# Altium PCB ad_test2_PCB_4_Temp.PcbDoc
Units mil, origin at the board's own origin, x right, y up, seen from the top; angles counter-clockwise.
Board outline 2150 x 870 mil, 4 copper layers (Top Layer, VCC, GND, Bottom Layer), stack 35.6 mil thick; 23 components, 22 nets, 98 pads, 12 vias.
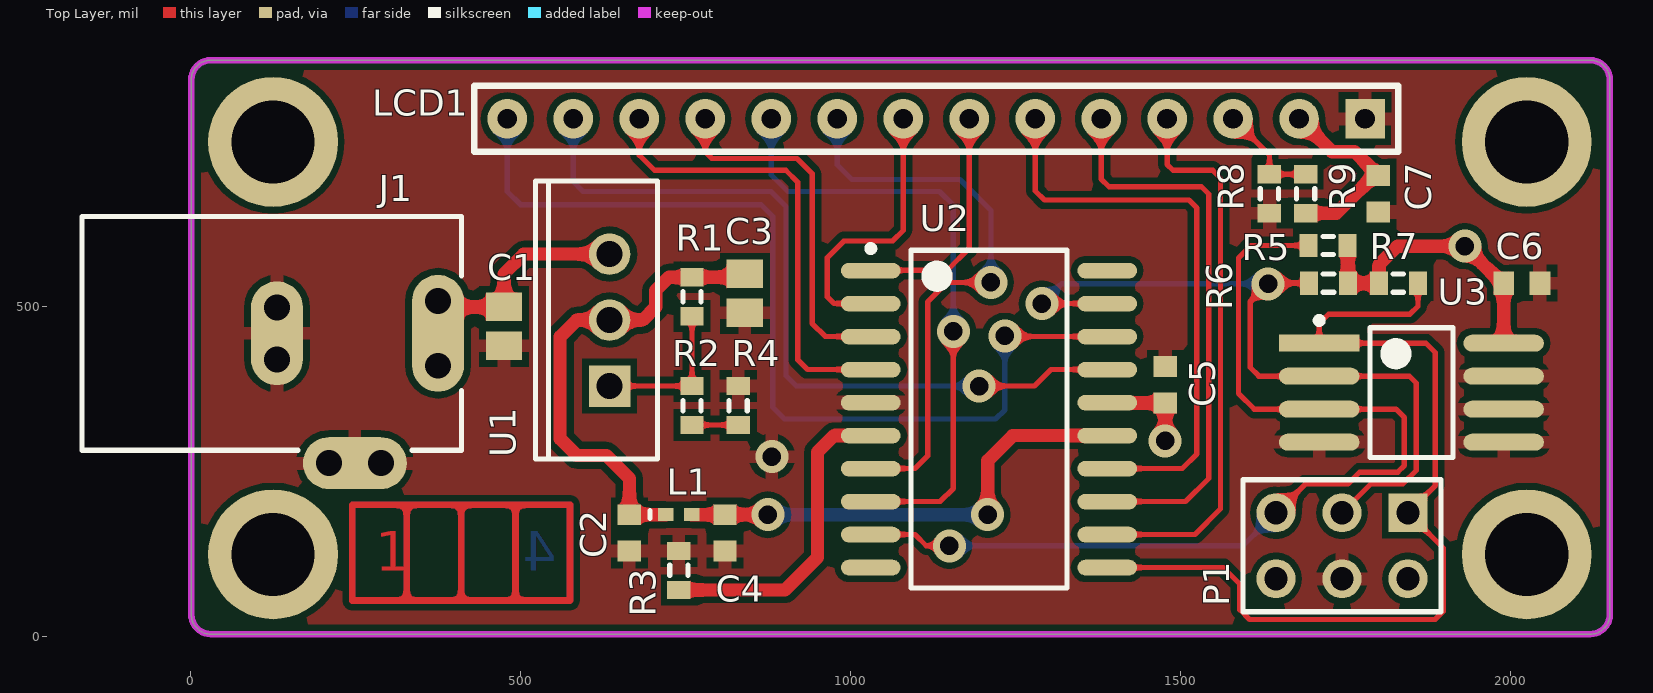
[diagram p0: Top Layer view]
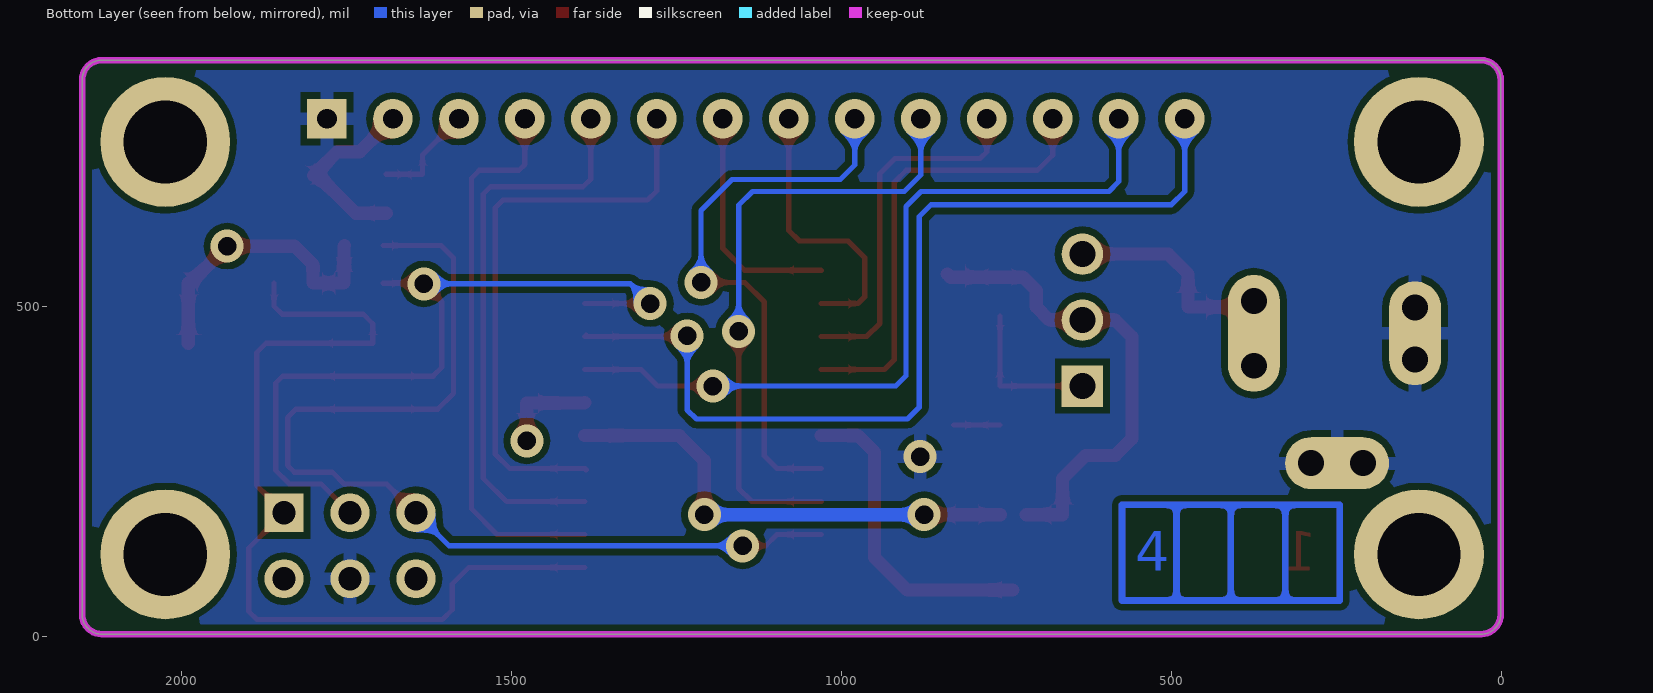
[diagram p1: Bottom Layer view, seen from below]
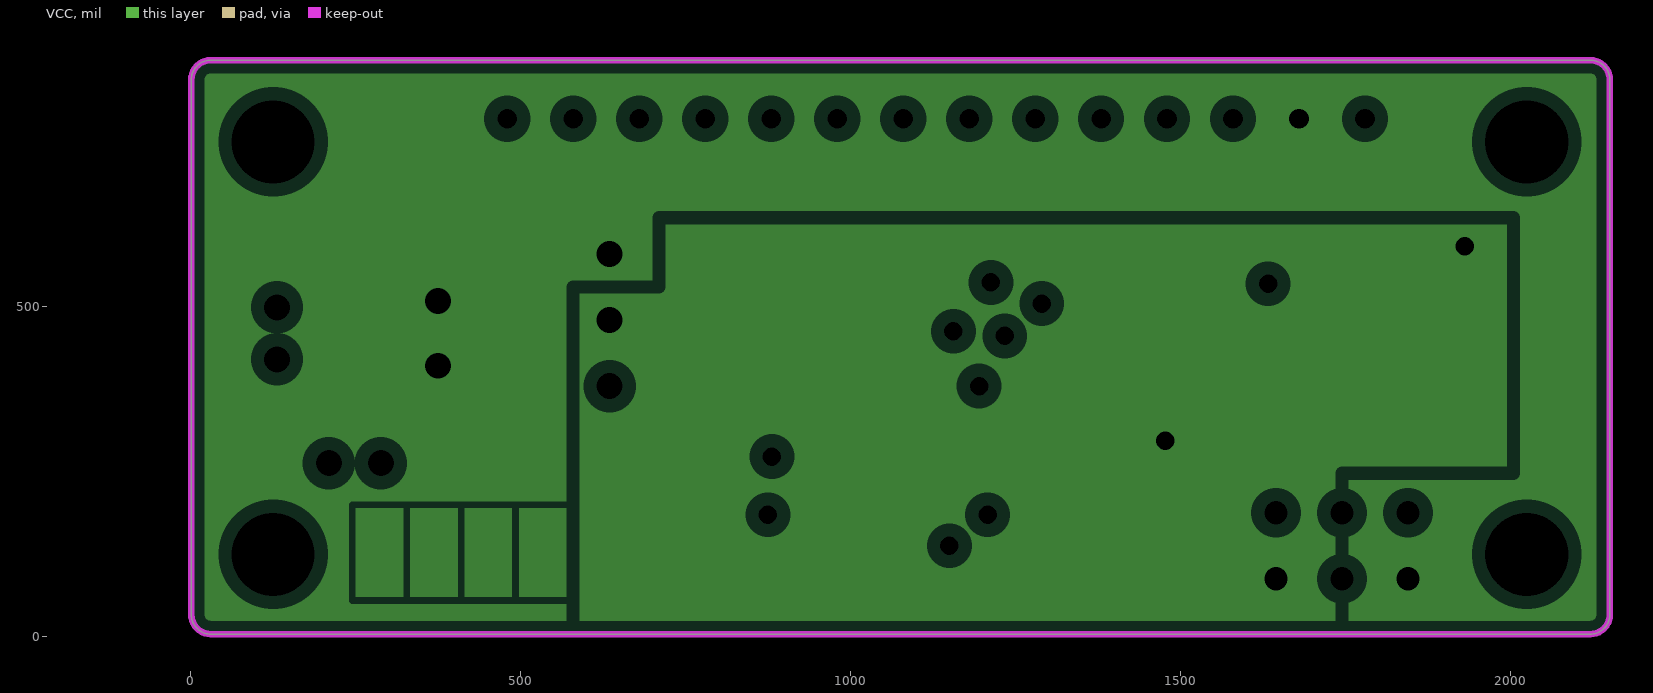
[diagram p2: VCC, clearances drawn from the general rule]
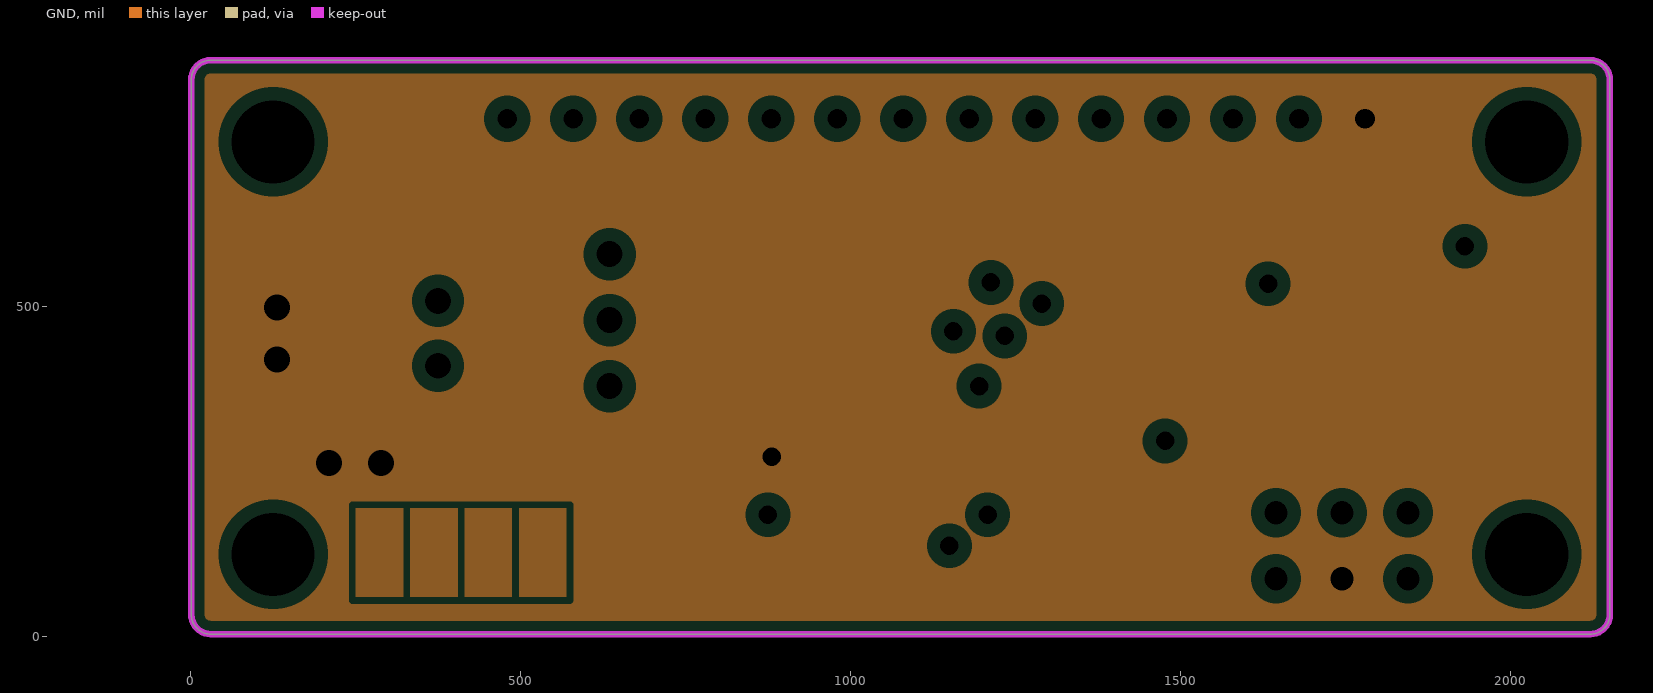
[diagram p3: GND, clearances drawn from the general rule]

## Layer stack, top to bottom
Top Solder: solder mask 0.4, Solder Resist, Dk 3.5
Top Layer: signal copper 1.4
Dielectric 1: core 10, FR-4, Dk 4.2
VCC: plane copper 1.4, net (Multiple Nets)
Dielectric 2: prepreg 10, Dk 4.2
GND: plane copper 1.4, net GND
Dielectric 3: core 10, Dk 4.2
Bottom Layer: signal copper 1.4
Bottom Solder: solder mask 0.4, Solder Resist, Dk 3.5

## Board outline
1,34 1,844 cw(c31,844) 31,874 2121,874 cw(c2121,844) 2151,844 2151,34 cw(c2121,34) 2121,4 31,4 cw(c31,34)

## Design rules (kind name [scope] priority, off if disabled: settings)
Clearance [All] p1: gap=10 ignorepadtopadclearanceinfootprint=FALSE except(0: Arc-Hole Track-Hole SMDPad-Hole THPad-Hole Via-Hole Fill-Hole Poly-Hole Region-Hole Text-Hole)
HoleSize [All] p1: absolutevalues=TRUE maxlimit=150 minlimit=1 maxpercent=80.000 minpercent=20.000
MinimumSolderMaskSliver [All] p1: minsoldermaskwidth=5
PlaneClearance [All] p1: clearance=20
PlaneConnect [All] p1: planeconnectstyle=Relief reliefexpansion=20 reliefentries=4 reliefconductorwidth=20 reliefairgap=10
PolygonConnect [All] p1: connectstyle=Relief reliefconductorwidth=20 reliefentries=4 polygonreliefangle="90 Angle" airgapwidth=10
RoutingVias [All] p1: holewidth=28 width=50 viastyle="Through Hole" minholewidth=28 minwidth=50 maxholewidth=28 maxwidth=50
SilkToSolderMaskClearance [IsPad] p1: minsilkscreentomaskgap=1 clearancetoexposedcopper=TRUE
SolderMaskExpansion [All] p1: expansion=4
Width [All] p1: maxlimit=20 minlimit=5 preferedwidth=10
25 further rules are at their usual default settings.

## Classes and differential pairs
net class RB[0..7]: RB0 RB1 RB2 RB3 RB4 RB5 RB6 RB7
component class Sensor: U3
component class Power: C1 C2 C3 C4 J1 L1 R1 R2 R3 R4 U1
component class MCU: C5 R5 R6 R7 U2
component class LCD: C7 LCD1 R8 R9

## Components (designator, comment, footprint, x,y, rotation, side; value= is the part's Value field where it differs from the comment)
C1 "Cap Pol3" C0805 475,470.47 r270 top value=100pF (schematic designator C4)
C2 "Cap Semi" 1608[0603] 665,157.56 r90 top value=100pF (schematic designator C5)
C3 "Cap Pol3" C0805 840,520.47 r270 top value=100pF
C4 "Cap Semi" 1608[0603] 810,157.56 r90 top value=100pF (schematic designator C6)
C5 "Cap Semi" 1608[0603] 1477,382 r270 top value=100pF (schematic designator C2)
C6 "Cap Semi" 1608[0603] 2017.56,536 r180 top value=100pF (schematic designator C7)
C7 "Cap Semi" 1608[0603] 1800,671.47 r90 top value=100pF (schematic designator C1)
J1 "PWR2.5" KLD-0202 -164.37,460 r0 top
L1 "Inductor" 0402-A 739.68,185.12 r0 top value=10mH
LCD1 "DMC-50448N" DMC-50448N 1780,785 r180 top
P1 "Header 3X2" HDR2X3 1845,188 r180 top
R1 "Res3" J1-0603 760,515.47 r270 top value=4.7K (schematic designator R6)
R2 "Res3" J1-0603 760,350.47 r270 top value=4.7K (schematic designator R7)
R3 "Res3" J1-0603 740,100.59 r270 top value=1K (schematic designator R8)
R4 "Res3" J1-0603 830,350.47 r90 top value=4.7K (schematic designator R9)
R5 "Res3" J1-0603 1724,593 r180 top value=1K (schematic designator R3)
R6 "Res3" J1-0603 1724.53,536 r180 top value=1K (schematic designator R4)
R7 "Res3" J1-0603 1830.53,536 r0 top value=1K (schematic designator R5)
R8 "Res3" J1-0603 1635,671.47 r270 top value=1K (schematic designator R2)
R9 "Res3" J1-0603 1690,671.47 r90 top value=1K (schematic designator R1)
U1 "LM317KC" KC03 635,480 r90 top (schematic designator U2)
U2 "PIC16C770-I/SO" SOIC-SO20_N 1210,330 r0 top (schematic designator U1)
U3 "TCN75" TCN75-SOIC 1710.47,445 r0 top

## Footprints (in the part's own frame and the unit in brackets; to place one, negate y for a bottom-side part, rotate by r counter-clockwise, add the part's x,y. Pads: shape width x height; smd on the part's side, far side on the other; paste and mask are expansions set on the pad)
0402-A [mm] "Chip Inductor, Body 1.0x0.5mm, IPC High Density"
  rect 0.6x0.5 smd: 1(-0.5,0) 2(0.5,0)
  silkscreen extent -1.1,-0.15 -1.1,0.15, body extent -0.55,-0.3 0.55,0.3, height 0.55
1608[0603] [mm] "Chip Capacitor, Body 1.6x0.8mm, IPC High Density"
  rect 0.8x0.9 smd: 1(-0.7,0) 2(0.7,0)
  body extent -0.87,-0.48 0.87,0.48, height 1.3
C0805 [mm] "Chip Capacitor, Body 2.0x1.3mm, IPC High Density"
  rect 1.1x1.4 smd: 1(-0.75,0) 2(0.75,0)
  body extent -1.1,-0.72 1.1,0.72, height 1.4
DMC-50448N [mil] "LCD,DMC-50448N"
  rect 60x60 hole 30: 1(0,0)
  round 60 hole 30: 2(100,0) 3(200,0) 4(300,0) 5(400,0) 6(500,0) 7(600,0) 8(700,0) 9(800,0) 10(900,0) 11(1000,0) 12(1100,0) 13(1200,0) 14(1300,0)
  silkscreen extent -50,-50 1350,50, body extent -10,50 -10,50, height 10
HDR2X3 [mm] "Connector; Header; 3x2 Position"
  rect 1.5x1.5 hole 0.9: 1(0,0)
  round 1.5 hole 0.9: 2(0,2.54) 3(2.54,0) 4(2.54,2.54) 5(5.08,0) 6(5.08,2.54)
  silkscreen extent -1.27,-1.27 6.35,3.81
J1-0603 [mm] "Chip Resistor, Body 1.6x0.8mm, IPC High Density"
  rect 0.7x0.9 smd: 1(-0.75,0) 2(0.75,0)
  silkscreen extent -0.2,-0.35 0.2,0.35, body extent -0.85,-0.48 0.85,0.48, height 0.9
KC03 [mm] "TO, Thru-Hole, Vertical, Heatsink Mounted; 3 In-Line Leads; Pitch 2.54 mm"
  rect 1.6x1.6 hole 1: 1(-2.54,0)
  round 1.6 hole 1: 2(0,0) 3(2.54,0)
  silkscreen extent -5.35,-1.85 5.35,2.85
KLD-0202 [mm] "DC Power Jack, 2.5mm, KLD Series, PCB Mount"
  oval 2x4.5 all layers, no hole: 1(13.7,0)
  round 1.5 hole 1: 1A(13.7,-1.25) 1B(13.7,1.25) 2A(7.5,-1) 2B(7.5,1) 3A(9.5,-5) 3B(11.5,-5)
  oval 2x4 all layers, no hole: 2(7.5,0)
  oval 4x2 all layers, no hole: 3(10.5,-5)
  silkscreen extent 0,-4.5 14.6,4.5
SOIC-SO20_N [mm] "SOIC, 20-Leads, Body 12.8x7.5mm, Pitch 1.27mm, IPC Medium Density"
  oval 2.3x0.6 smd: 1(-4.55,5.715) 2(-4.55,4.445) 3(-4.55,3.175) 4(-4.55,1.905) 5(-4.55,0.635) 6(-4.55,-0.635) 7(-4.55,-1.905) 8(-4.55,-3.175) 9(-4.55,-4.445) 10(-4.55,-5.715) 11(4.55,-5.715) 12(4.55,-4.445) 13(4.55,-3.175) 14(4.55,-1.905) 15(4.55,-0.635) 16(4.55,0.635) 17(4.55,1.905) 18(4.55,3.175) 19(4.55,4.445) 20(4.55,5.715)
  silkscreen extent -4.67,-6.5 3,6.69, body extent -3.75,-6.5 3.75,6.5, height 2.65
TCN75-SOIC [mm] "TCN75-SOIC, 8-Leads, Body 4.90x3.90mm, Pitch 1.27mm, IPC Low Density"
  rect 3.1x0.65 smd: 1(0,0)
  oval 3.1x0.65 smd: 2(0,-1.27) 3(0,-2.54) 4(0,-3.81) 5(7.1,-3.81) 6(7.1,-2.54) 7(7.1,-1.27) 8(7.1,0)
  silkscreen extent -0.12,-4.41 5.15,1, body extent 1.55,-4.41 5.55,0.6, height 1.75

## Part data
C1 C3: "Polarized Capacitor (Surface Mount)", LatestRevisionDate=29-May-2009, LatestRevisionNote="IPC-7351 Footprint Added.", PackageDescription="Chip Capacitor", PackageReference=C0805, Published=8-Jun-2000, Publisher="Altium Limited"
C2 C4 C5 C6 C7: "Capacitor (Semiconductor SIM Model)", LatestRevisionDate=29-May-2009, LatestRevisionNote="IPC-7351 Footprint Added.", PackageDescription="Chip Capacitor", PackageReference=C1206, Published=8-Jun-2000, Publisher="Altium Limited"
J1: "Low Voltage Power Supply Connector", ComponentLink1Description="Manufacturer Link", ComponentLink1URL=http://domino.kycon.com/internet/Products.html, DatasheetDocument=09-May-2002, Published=17-Dec-2003, Publisher="Altium Limited"
LCD1: "8 Character X 2 Line / LCD Display"
P1: "Header, 3-Pin, Dual row", LatestRevisionDate=17-Jul-2002, LatestRevisionNote="Re-released for DXP Platform.", Publisher="Altium Limited"
R1 R2 R3 R4 R5 R6 R7 R8 R9: "Resistor", LatestRevisionDate=29-May-2009, LatestRevisionNote="IPC-7351 Footprint Added.", PackageDescription="Chip Resistor", PackageReference=J1-0603, Published=8-Jun-2000, Publisher="Altium Limited"
U1: "3-Terminal Adjustable Regulator", ComponentLink1Description="Manufacturer Link", ComponentLink1URL=http://www.ti.com/, DatasheetVersion=Feb-1988, Note="Pin 2 is electrically connected to tab", PackageDescription="TO, Thru-Hole, Vertical, Heatsink Mounted; 3 In-Line Leads; Pitch 2.54 mm", PackageReference=KC03, PackageVersion=Sep-1995, Published=15-Apr-2002, Publisher="Altium Limited"
U2: "8-Bit CMOS Microcontroller with 12-Bit A/D, 2K (x14-Bit words) EPROM, 256 Bytes RAM, 20-Pin SOIC, 4.0 to 5.5V Supply Range, Industrial Temperature", Supplier Part Number 1=PIC16C770-I/SO-ND, Code_IPC=SOIC127P1030-20, Code_JEDEC=MS-013-AC, ComponentAvailability="Unknown. Contact manufacturer to determine status.", ComponentLink1Description=Datasheet, ComponentLink1URL=http://ww1.microchip.com/downloads/en/DeviceDoc/41120b.pdf, ComponentLink2Description="Packaging Specification", ComponentLink2URL=http://www.microchip.com/stellent/groups/techpub_sg/documents/packagingspec/en012702.pdf, ComponentLink3Description="Microchip.com Home", ComponentLink3URL=http://www.microchip.com/, DatasheetVersion="revB, Feb-2002", LatestRevisionDate=29-Jan-2009, LatestRevisionNote="Sch. layout revised. 3D Model Removed.", PackageDescription="20-Lead Plastic Small Outline (SO) - Wide 7.50mm Body [SOIC]", PackageReference=SOIC-SO20, PackageVersion="revBB, Aug-2009", Published=11-Oct-2004, Publisher="Altium Limited", Supplier 1=Digi-Key
U3: "TCN75数字温度传感器将-40°C到+125°C范围内的温度转换为数字"
L1: Code_IEC=1005, Code_JEITA=0402, LatestRevisionDate=29-May-2009, LatestRevisionNote="IPC-7351 Footprint Added.", PackageDescription="Chip Inductor", PackageReference=0402-A, Published=8-Jun-2000, Publisher="Altium Limited"

## Free pads (board coordinates)
  round 196.85 hole 125.98: 0(125,125) 0(125,750) 0(2025,125) 0(2025,750)

## Via types
v1: diameter 50, hole 28, Top Layer to Bottom Layer, 12 vias

## Nets (pads, with @x,y where several pads share a name; then routed paths per layer and width w, separated by ;. In a path a pad name is that pad's centre, name@x,y a point inside that pad or via, vN(x,y) a via of type N, cw(c..) or ccw(c..) an arc to the next point about the centre after c; other vN are vias at no path point)
3V3: C2.2 C3.1 C5.2 C6.2 L1.1 P1.6 R1.1 R5.1 R6.1 R7.1 U1.2 U2.16 U3.8 | length 1321.2
  Top Layer w20: L1.1 C2.2 665,240 630,275 585,275 560,300 560,455 585,480 U1.2 685,480 705,500 705,525 725,545 R1.1 835,545 C3.1 ; U2.16 1389.69,354.44 C5.2 v1(1477,297) ; R5.1 1754.06,592.47 R6.1 R7.1 1801,564 1829,592 v1(1931.26,592) 1987.26,536 C6.2 U3.8
5V: C1.1 C7.2 J1.1 J1.1A J1.1B LCD1.2 P1.2 R9.1 U1.3 | length 615.5
  Top Layer w20: J1.1B 384.21,500 C1.1 475,550 505,580 U1.3 ; LCD1.2 1730,735 1764.03,735 C7.2 1793.37,699.03 1736.28,641.94 R9.1
AGND: R3.2 U2.6 | length 481.5
  Top Layer w20: R3.2 901.06,71.06 950,120 950,280 975,305 U2.6
AVDD: C4.2 L1.2 U2.15 | length 734.6
  Top Layer w20: L1.2 C4.2 874.88,185.12 v1(875,185) ; v1(1208,185) 1208,267 1246,305 U2.15
  Bottom Layer w20: v1(875,185) v1(1208,185) v1@1215,185
GND: C1.2 C2.1 C3.2 C4.1 C5.1 C6.1 C7.1 J1.2 J1.2A J1.2B J1.3 J1.3A J1.3B LCD1.1 P1.4 R3.1 R4.2 R8.2 U2.5 U3.4 U3.5 U3.6 U3.7
  other v1: 881,273
NetLCD1_3: LCD1.3 R8.1 R9.2 | length 161.8
  Top Layer w8: LCD1.3 1635,730 R8.1 R9.2
NetLCD1_4: LCD1.4 U2.12 | length 847.7
  Top Layer w8: U2.12 1522,155 1561,194 1561,695 1549,707 1489,707 1480,716 LCD1.4
NetLCD1_5: LCD1.5 U2.13 | length 862.9
  Top Layer w8: LCD1.5 1380,694 1392,682 1532,682 1543,671 1543,240 1508,205 U2.13
NetLCD1_6: LCD1.6 U2.14 | length 885.6
  Top Layer w8: LCD1.6 1280,676 1294,662 1513,662 1525,650 1525,277 1503,255 U2.14 U2.14@1387.13,253
NetP1_1: P1.1 R7.2 U2.11 U3.1 | length 1408.4
  Top Layer w8: U2.11 1565,105 1590,80 1590,41 1604.83,26.17 1886.17,26.17 1898.5,38.5 1898.5,134.5 P1.1 1886.5,229.5 1886.5,430.5 1872,445 U3.1 1710.47,474.47 1725,489 1848,489 1860.06,501.06 R7.2
NetP1_3: P1.3 R6.2 U2.19 U3.2 | length 1187.9
  Top Layer w8: v1(1290,505) U2.19 ; R6.2 1634,536 v1(1633,535) 1606,508 1606,408 1619,395 U3.2 1847,395 1857.53,384.47 1857.53,252.07 1836.98,231.53 1788.53,231.53 P1.3
  Bottom Layer w8: v1(1290,505) 1320,535 v1(1633,535)
NetP1_5: P1.5 R5.2 U2.9 U3.3 | length 1525
  Top Layer w8: U2.9 1098,155 1115,138 v1(1150,138) ; P1.5 1646,188 1689.53,231.53 1754,231.53 1772,249.53 1829.53,249.53 1839.53,259.53 1839.53,332.47 1827,345 U3.3 1612,345 1588,369 1588,574 1607,593 R5.2
  Bottom Layer w8: v1(1150,138) 1595,138 P1.5
NetR1_2: R1.2 R2.1 U1.1 | length 230.9
  Top Layer w8: U1.1 R2.1 R1.2
NetR2_2: R2.2 R4.1 | length 70
  Top Layer w8: R2.2 R4.1
RB0: LCD1.7 U2.1 | length 359.4
  Top Layer w8: U2.1 1031.41,555.54 1146.85,555.54 1180,588.69 LCD1.7
RB1: LCD1.8 U2.2 | length 431
  Top Layer w8: U2.2 975,505 965,515 965,575 990,600 1064,600 1080,616 LCD1.8
RB2: LCD1.9 U2.7 | length 876.1
  Top Layer w8: U2.7 1098,255 1117,274 1117,507.15 1146.85,537 v1(1213,537)
  Bottom Layer w8: LCD1.9 980,715 1002,693 1166,693 1213,646 v1(1213,537)
RB3: LCD1.10 U2.8 | length 942.5
  Top Layer w8: U2.8 1136,205 1156,225 v1(1156,463)
  Bottom Layer w8: LCD1.10 880,700 905,675 1135,675 1156,654 v1(1156,463)
RB4: LCD1.11 U2.3 | length 549.8
  Top Layer w8: LCD1.11 780,735 790,725 919,725 942,702 942,475 962,455 U2.3
RB5: LCD1.12 U2.4 | length 698.1
  Top Layer w8: LCD1.12 680,730 703,707 902,707 920,689 920,420 935,405 U2.4
RB6: LCD1.13 U2.17 | length 1193.2
  Top Layer w8: v1(1195,380) 1279,380 1304,405 U2.17
  Bottom Layer w8: LCD1.13 580,690 595,675 879.54,675 902.27,652.27 902.27,395.73 918,380 v1(1195,380)
RB7: LCD1.14 U2.18 | length 1454.1
  Top Layer w8: v1@1243,457 1245,455 U2.18 U2.18@1387.13,457
  Bottom Layer w8: LCD1.14 480,675 500,655 864.09,655 882.5,636.59 882.5,347.5 900,330 1220,330 1234,344 v1(1234,456) 1240,456 v1@1243,459
pads on no net: U2.10 U2.20
copper on no net: | length 2770
  Top Layer w10: 327.5,55 327.5,200 ; 410,55 410,200 ; 492.5,55 492.5,200 ; 245,55 245,200 575,200 575,55 245,55
  Bottom Layer w10: 327.5,55 327.5,200 ; 410,55 410,200 ; 492.5,55 492.5,200 ; 245,55 575,55 575,200 245,200 245,55

## Polygon pours and split planes (outlines as drawn)
GND on Bottom Layer "GND_L04_P015" (solid, remove dead copper, pour order 15): 1,34 1,844 cw(c31,844) 31,874 2121,874 cw(c2121,844) 2151,844 2151,34 cw(c2121,34) 2121,4 31,4 cw(c31,34)
GND on Top Layer "GND_L01_P014" (solid, remove dead copper, pour order 14): 1,34 1,844 cw(c31,844) 31,874 2121,874 cw(c2121,844) 2151,844 2151,34 cw(c2121,34) 2121,4 31,4 cw(c31,34)
GND on GND (split plane): 2123.58,853.65 2125.99,852.65 2128.06,851.06 2129.65,848.99 2130.65,846.58 2130.94,844.36 2130.9,844 2130.9,34 2130.94,33.64 2130.65,31.42 2129.65,29.01 2128.06,26.94 2125.99,25.35 2123.58,24.35 2121.36,24.06 2121,24.1 31,24.1 30.64,24.06 28.42,24.35 26.01,25.35 23.94,26.94 22.35,29.01 21.35,31.42 21.06,33.64 21.1,34 21.1,844 21.06,844.36 21.35,846.58 22.35,848.99 23.94,851.06 26.01,852.65 28.42,853.65 30.64,853.94 31,853.9 2121,853.9 2121.36,853.94
GND on GND (split plane): 322.4,60.1 250.1,60.1 250.1,194.9 322.4,194.9
GND on GND (split plane): 569.9,60.1 497.6,60.1 497.6,194.9 569.9,194.9
GND on GND (split plane): 404.9,60.1 332.6,60.1 332.6,194.9 404.9,194.9
GND on GND (split plane): 487.4,60.1 415.1,60.1 415.1,194.9 487.4,194.9
no net on VCC (split plane): 569.62,60.1 497.6,60.1 497.6,194.9 569.62,194.9
no net on VCC (split plane): 487.4,60.1 415.1,60.1 415.1,194.9 487.4,194.9
3V3 on VCC (split plane): 1994.91,258.09 1745,258.09 1742.39,257.74 1739.96,256.73 1737.87,255.13 1736.26,253.04 1735.26,250.61 1734.91,248 1734.91,24.1 589.8,24.1 589.8,519.91 710,519.91 712.61,520.26 715.04,521.27 717.13,522.87 718.73,524.96 719.74,527.39 720.09,530 720.09,624.91 1994.91,624.91
no net on VCC (split plane): 404.9,60.1 332.6,60.1 332.6,194.9 404.9,194.9
no net on VCC (split plane): 322.4,60.1 250.1,60.1 250.1,194.9 322.4,194.9
5V on VCC (split plane): 2123.58,853.65 2125.99,852.65 2128.06,851.06 2129.65,848.99 2130.65,846.58 2130.94,844.36 2130.9,844 2130.9,34 2130.94,33.64 2130.65,31.42 2129.65,29.01 2128.06,26.94 2125.99,25.35 2123.58,24.35 2121.36,24.06 2121,24.1 1755.09,24.1 1755.09,237.91 2005,237.91 2007.61,238.26 2010.04,239.27 2012.13,240.87 2013.74,242.96 2014.74,245.39 2015.09,248 2015.09,635 2014.74,637.61 2013.74,640.04 2012.13,642.13 2010.04,643.73 2007.61,644.74 2005,645.09 710,645.09 707.39,644.74 704.96,643.73 702.87,642.13 701.27,640.04 700.26,637.61 699.91,635 699.91,540.09 579.71,540.09 577.1,539.74 574.67,538.73 572.58,537.13 570.97,535.04 569.97,532.61 569.62,530 569.62,205.1 245,205.1 243.05,204.71 241.4,203.6 240.29,201.95 239.9,200 239.9,55 240.29,53.05 241.4,51.4 243.05,50.29 245,49.9 569.62,49.9 569.62,24.1 31,24.1 30.64,24.06 28.42,24.35 26.01,25.35 23.94,26.94 22.35,29.01 21.35,31.42 21.06,33.64 21.1,34 21.1,844 21.06,844.36 21.35,846.58 22.35,848.99 23.94,851.06 26.01,852.65 28.42,853.65 30.64,853.94 31,853.9 2121,853.9 2121.36,853.94

## Keep-outs
Keep-Out Layer:
  the board outline again, w10

## Other copper
Top Layer:
  text "1" at 280,100 h60
Bottom Layer:
  text "4" at 555,100 h60
VCC (plane layer: these items are gaps in the copper):
  region: 280,135
  lines w10: 327.5,55 327.5,200 ; 410,55 410,200 ; 492.5,55 492.5,200 ; 245,55 245,200 575,200 575,55 245,55
  lines w20: 579.71,4 579.71,530 710,530 710,635 2005,635 2005,248 1745,248 1745,4
  text "2" at 350,100 h60
GND (plane layer: these items are gaps in the copper):
  lines w10: 327.5,55 327.5,200 ; 410,55 410,200 ; 492.5,55 492.5,200 ; 245,55 245,200 575,200 575,55 245,55
  text "3" at 470,100 h60